# Altium PCB Dev_BRD_STM32F030F4P6TR.PcbDoc
Units mm, origin at the board's own origin, x right, y up, seen from the top; angles counter-clockwise.
Board outline 20 x 22 mm, 2 copper layers (Top Layer, Bottom Layer); 38 components, 24 nets, 78 pads, 15 vias.
Unrouted connection lines stored in the file: 1.
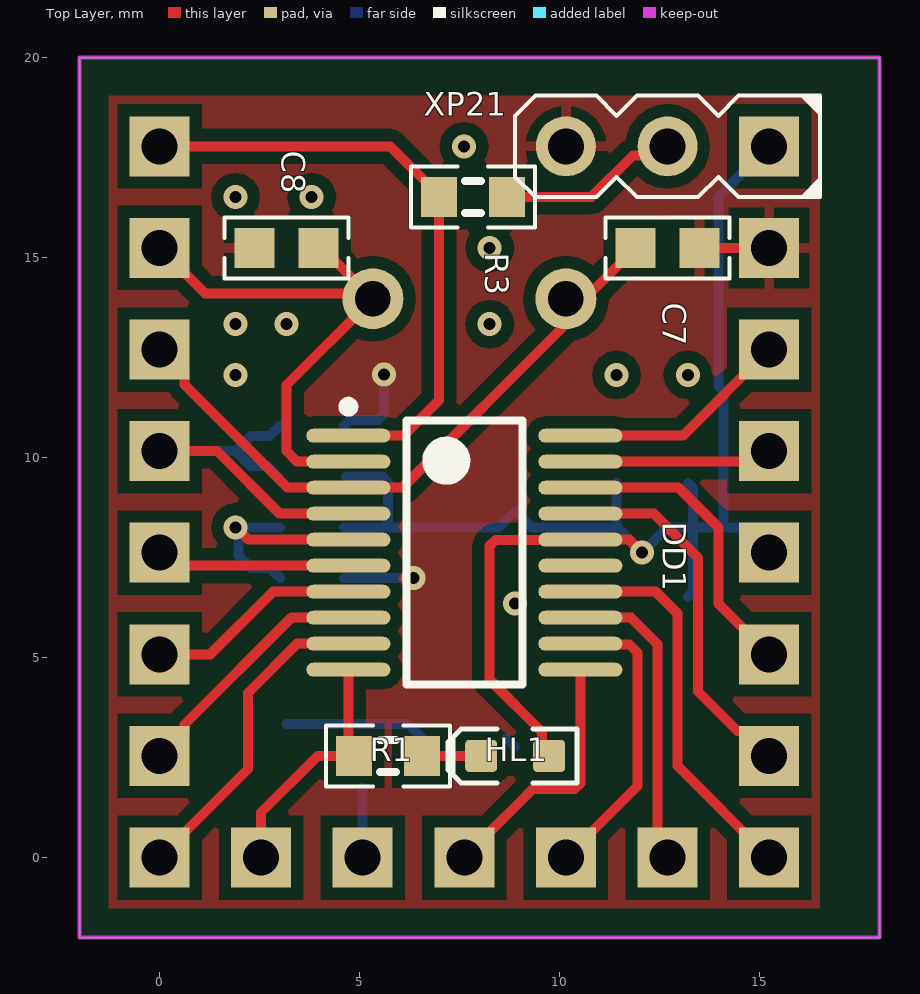
[diagram p0: Top Layer view]
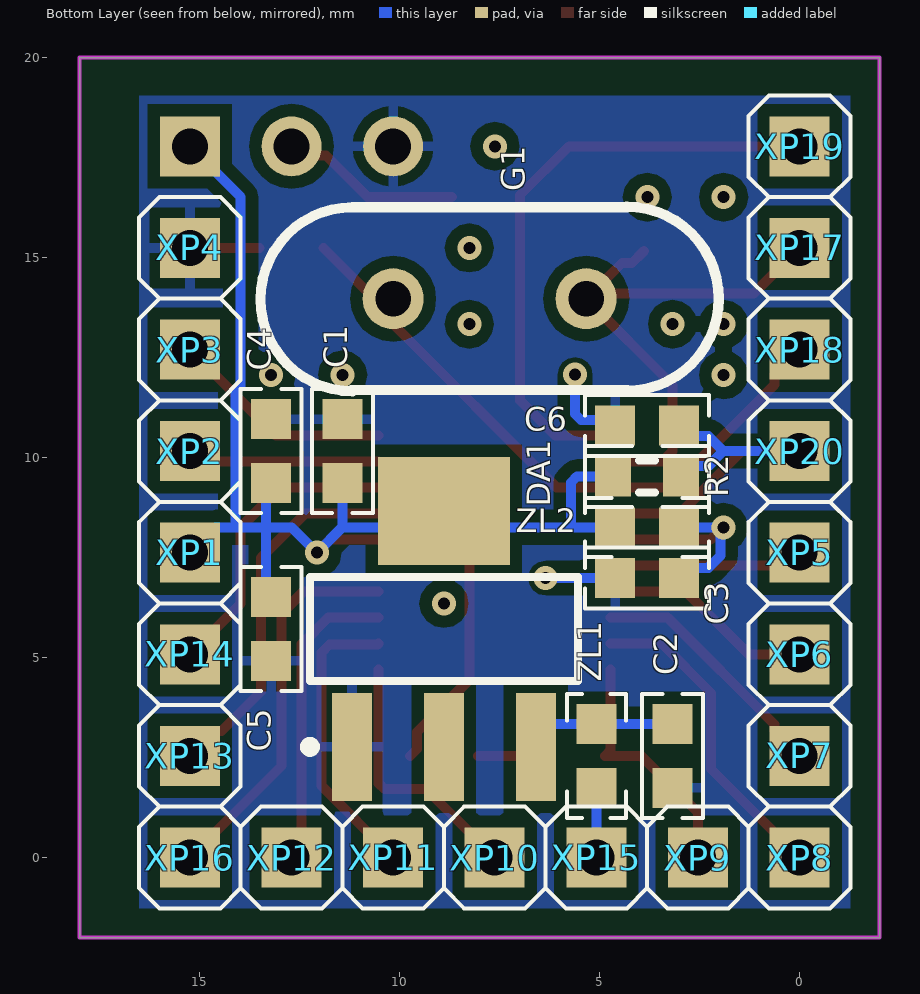
[diagram p1: Bottom Layer view, seen from below]

## Layer stack, top to bottom
Top Solder: solder mask 0.0102, Solder Resist, Dk 3.5
Top Layer: signal copper 0.0356
Dielectric 1: dielectric 0.32, FR-4, Dk 4.8
Bottom Layer: signal copper 0.0356
Bottom Solder: solder mask 0.0102, Solder Resist, Dk 3.5

## Board outline
-2,-2 -2,20 18,20 18,-2

## Design rules (kind name [scope] priority, off if disabled: settings)
Clearance Clearance_1 [InPoly] p1: gap=0.3 ignorepadtopadclearanceinfootprint=TRUE except(0: Arc-Hole Track-Hole SMDPad-Hole THPad-Hole Via-Hole Fill-Hole Poly-Hole Region-Hole Text-Hole)
Clearance [All] p2: gap=0.2 ignorepadtopadclearanceinfootprint=TRUE except(0: Arc-Hole Track-Hole SMDPad-Hole THPad-Hole Via-Hole Fill-Hole Poly-Hole Region-Hole Text-Hole)
PolygonConnect [All] p1: thpad.connectstyle=Relief thpad.reliefconductorwidth=0.254 thpad.reliefentries=4 thpad.polygonreliefangle="90 Angle" thpad.airgapwidth=0.254 smdpad.connectstyle=Relief smdpad.reliefconductorwidth=0.254 smdpad.reliefentries=4 smdpad.polygonreliefangle="90 Angle" smdpad.airgapwidth=0.254 via.connectstyle=Direct via.reliefconductorwidth=0.254 via.reliefentries=4 via.polygonreliefangle="90 Angle" via.airgapwidth=0.254
RoutingVias [All] p1: holewidth=0.5 width=0.8 viastyle="Through Hole" minholewidth=0.3 minwidth=0.6 maxholewidth=0.8 maxwidth=1.2
SolderMaskExpansion [All] p1: expansion=0.102 istentingtop=FALSE
Width [All] p1: maxlimit=0.5 minlimit=0.15 preferedwidth=0.25
30 further rules are at their usual default settings.

## Components (designator, comment, footprint, x,y, rotation, side; value= is the part's Value field where it differs from the comment)
C1 "10u" CAPC1608(0603)N 11.43,10.16 r270 bottom
C2 "10u" CAPC1608(0603)N 3.175,2.54 r90 bottom
C3 "100n" CAPC1608(0603)N 3.81,6.985 r180 bottom
C4 "100n" CAPC1608(0603)N 13.208,10.16 r270 bottom
C5 "10u" CAPC1608(0603)N 13.208,5.715 r90 bottom
C6 "100n" CAPC1608(0603)N 3.81,10.795 r180 bottom
C7 "12p" CAPC1608(0603)N 12.7,15.24 r180 top
C8 "12p" CAPC1608(0603)N 3.175,15.24 r0 top
DA1 "LD1117S33T" SOT223_M 8.89,5.715 r90 bottom
DD1 "STM32F030F4P6TR" STM-TSSOP20_M 7.62,7.62 r0 top
G1 "8MHz" HC-49/S 10.16,13.97 r180 bottom
HL1 "Bl 0603" LED-0603-BLUE 8.89,2.54 r180 top
R1 "510" RESC1608(0603)N 5.715,2.54 r180 top
R2 "10k" RESC1608(0603)N 3.81,9.525 r0 bottom
R3 "100k" RESC1608(0603)N 7.835,16.51 r0 top
XP1 "PLS-1" PLS-1-3D 15.24,7.62 r180 bottom
XP2 "PLS-1" PLS-1-3D 15.24,10.16 r180 bottom
XP3 "PLS-1" PLS-1-3D 15.24,12.7 r180 bottom
XP4 "PLS-1" PLS-1-3D 15.24,15.24 r180 bottom
XP5 "PLS-1" PLS-1-3D 0,7.62 r180 bottom
XP6 "PLS-1" PLS-1-3D 0,5.08 r180 bottom
XP7 "PLS-1" PLS-1-3D 0,2.54 r180 bottom
XP8 "PLS-1" PLS-1-3D 0,0 r180 bottom
XP9 "PLS-1" PLS-1-3D 2.54,0 r180 bottom
XP10 "PLS-1" PLS-1-3D 7.62,0 r180 bottom
XP11 "PLS-1" PLS-1-3D 10.16,0 r180 bottom
XP12 "PLS-1" PLS-1-3D 12.7,0 r180 bottom
XP13 "PLS-1" PLS-1-3D 15.24,2.54 r180 bottom
XP14 "PLS-1" PLS-1-3D 15.24,5.08 r180 bottom
XP15 "PLS-1" PLS-1-3D 5.08,0 r90 bottom
XP16 "PLS-1" PLS-1-3D 15.24,0 r180 bottom
XP17 "PLS-1" PLS-1-3D 0,15.24 r180 bottom
XP18 "PLS-1" PLS-1-3D 0,12.7 r180 bottom
XP19 "PLS-1" PLS-1-3D 0,17.78 r180 bottom
XP20 "PLS-1" PLS-1-3D 0,10.16 r180 bottom
XP21 "PLS-3" PLS-3-3D 15.24,17.78 r180 top
ZL1 "100u" INDC1608(0603)N 5.08,2.54 r90 bottom
ZL2 "100u" INDC1608(0603)N 3.81,8.255 r180 bottom

## Footprints (in the part's own frame and the unit in brackets; to place one, negate y for a bottom-side part, rotate by r counter-clockwise, add the part's x,y. Pads: shape width x height; smd on the part's side, far side on the other; paste and mask are expansions set on the pad)
CAPC1608(0603)N [mm] "Chip Capacitor, Body 1.6x0.8mm, IPC Medium Density"
  rect 1x1 smd: 1(-0.8,0) 2(0.8,0)
  silkscreen extent -1.55,-0.76 1.55,0.76, body extent -0.8,-0.4 0.8,0.4, height 0.3
HC-49/S [mil]
  round 60 hole 35: 1(0,0) 2(190,0)
  silkscreen extent -131,-91 321,91, body extent -128,-92 318,92, height 142
INDC1608(0603)N [mm] "Chip Inductor, Body 1.6x0.8mm, IPC Medium Density"
  rect 1x1 smd: 1(-0.8,0) 2(0.8,0)
  silkscreen extent -1.55,-0.74 1.55,0.74, body extent -0.87,-0.48 0.87,0.48, height 0.71
LED-0603-BLUE [mm]
  round 0.254 on Mech15: 0(0,0)
  rrect25% 0.8x0.8 smd: A(-0.85,0) K(0.85,0)
  Top Layer pour cut-out: -0.5,0.5 0.5,0.5 0.5,-0.5 -0.5,-0.5
  silkscreen extent -1.55,-0.67 1.68,0.67, body extent -0.8,-0.4 0.8,0.4, height 0.75
PLS-1-3D [mm] "Connector; Header; 1 Position"
  rect 1.5x1.5 hole 0.9: 1(0,0)
  silkscreen extent -1.27,-1.27 1.27,1.27, body extent -1.27,-1.27 1.27,1.27, height 8.44
PLS-3-3D [mm] "Connector; Header; 3 Position"
  rect 1.5x1.5 hole 0.9: 1(0,0)
  round 1.5 hole 0.9: 2(2.54,0) 3(5.08,0)
  silkscreen extent -1.27,-1.27 6.35,1.27, body extent -1.27,-1.27 6.35,1.27, height 8.44
RESC1608(0603)N [mm] "Chip Resistor, Body 1.6x0.8mm, IPC Medium Density"
  rect 0.9x1 smd: 1(-0.85,0) 2(0.85,0)
  silkscreen extent -1.55,-0.76 1.55,0.76, body extent -0.8,-0.4 0.8,0.4, height 0.3
SOT223_M [mm] "SOT223, 4-Leads, Body 6.5x3.5mm, Pitch 2.3mm, Lead Span 7mm, IPC Low Density"
  rect 2.7x1 smd: 1(-2.95,2.3) 2(-2.95,0) 3(-2.95,-2.3)
  rect 2.7x3.3 smd: 4(2.95,0)
  silkscreen extent -3.07,-3.35 1.3,3.48, body extent -3.65,-3.35 3.65,3.35, height 1.7
STM-TSSOP20_M [mm] "SOP, 20-Leads, Body 6.6x4.5mm, Pitch 0.65mm, IPC Low Density"
  oval 2.1x0.35 smd: 1(-2.9,2.925) 2(-2.9,2.275) 3(-2.9,1.625) 4(-2.9,0.975) 5(-2.9,0.325) 6(-2.9,-0.325) 7(-2.9,-0.975) 8(-2.9,-1.625) 9(-2.9,-2.275) 10(-2.9,-2.925) 11(2.9,-2.925) 12(2.9,-2.275) 13(2.9,-1.625) 14(2.9,-0.975) 15(2.9,-0.325) 16(2.9,0.325) 17(2.9,0.975) 18(2.9,1.625) 19(2.9,2.275) 20(2.9,2.925)
  silkscreen extent -3.02,-3.3 1.45,3.77, body extent -2.25,-3.3 2.25,3.3, height 1.2

## Part data
C1 C2 C3 C4 C5 C6 C7 C8: library part CAPC1608(0603), "?", Digi-Key Part Number=?, HelpURL=?, Manufacturer Part Number=?, Note=?, Package=?, Part Number=CAPC1608(0603), Price$=?
DA1: "LDO Voltage Regulators 3.3V 0.8A Positive", Digi-Key Part Number=?, HelpURL=http://www.mouser.com/ds/2/389/CD00000544-310772.pdf, Manufacturer Part Number=?, Note=?, Package=?, Part Number=LD1117S33T, Price$=?
DD1: "ARM Microcontrollers - MCU Entry-level ARM Cortex-M0 Value MCU", I/Os (High Current)=15, Mouser Part Number=511-STM32F030F4P6TR, Operating Frequency(F) (Processor speed) (MHz)=48, Package=TSSOP-20, PartNumber=STM32F030F4P6, Supplier Part Number 1=497-14044-5-ND, Supply Voltage(Vcc) min (V)=2.4, ComponentLink1Description="Manufacturer URL", ComponentLink1URL=http://www.st.com/web/en/home.html, ComponentLink2Description=Datasheet, ComponentLink2URL=http://www.st.com/st-web-ui/static/active/en/resource/technical/document/datasheet/DM00088500.pdf, ComponentLink3Description="Package Specification", ComponentLink3URL=http://www.st.com/st-web-ui/static/active/en/resource/technical/document/datasheet/DM00065136.pdf, Core="ARM Cortex-M0", DatasheetVersion="Rev. 1", FLASH Size (Prog) (kB)=16, HelpURL=https://www.mouser.com/ProductDetail/STMicroelectronics/STM32F030F4P6TR?qs=%2Fha2pyFadujR%2FWSfahMbfmbDlEliJR9JQ7e4pIkAHR743YF4U76%252Bsg%3D%3D, Internal RAM Size (kB)=4, Manufacturer Part Number=STM32F030F4P6TR, Mounting Technology="Surface Mount", PackageDescription="20-Pin Thin Shrink Small Outline Package, 6.5 x 4.4 mm Body, 0.65 mm Pitch", PackageReference=TSSOP20, PackageVersion="Rev. 1, 11/2012", Packing=Tube, Part Number=STM32F030F4P6TR, Price$=0.534, Supplier 1=Digi-Key, Supplier 2=Newark, Supplier 3=Mouser, Supplier Part Number 2=06X3648, Supplier Part Number 3=511-STM32F030F4P6
G1: library part "Crystal HC-49/S", "Crystal HC-49/S", Part Number="Crystal HC-49/S"
HL1: library part 150060BS55040, "LED BLUE DIFFUSED 0603 SMD", Digi-Key Part Number=732-12013-1-ND, Package=0603, HelpURL=https://www.digikey.com/products/en?keywords=732-12013-1-ND, Manufacturer Part Number=150060BS55040, Part Number=150060BS55040
R1 R2 R3: library part RESC1608(0603), Digi-Key Part Number=???, HelpURL=???, Manufacturer Part Number=???, Note=???, Package=???, Part Number=RESC1608(0603), Price$=???
XP1 XP2 XP3 XP4 XP5 XP6 XP7 XP8 XP9 XP10 XP11 XP12 XP13 XP14 XP15 XP16 XP17 XP18 XP19 XP20: "CONN HEADER VERT 1POS", Digi-Key Part Number=S1011EC-01-ND, Manufacturer Part Number=PRPC001SAAN-RC, HelpURL=https://www.digikey.com/product-detail/en/sullins-connector-solutions/PRPC001SAAN-RC/S1011EC-01-ND/2775253, Note=???, Part Number=PLS-1, Price$=0.05
XP21: library part PR20203VBNN, "CONN HEADER VERT 3POS 2.54MM", Digi-Key Part Number=1849-1003-ND, Package="Header 3POS 2.54mm", HelpURL=https://www.digikey.com/product-detail/en/metz-connect-usa-inc/PR20203VBNN/1849-1003-ND/7794768, Manufacturer Part Number=PR20203VBNN, Part Number=PR20203VBNN
ZL1 ZL2: library part Ferite1608(0603), "ferite bead", Digi-Key Part Number=???, Manufacturer Part Number=???, Note=???, Package=???, Part Number=Ferite1608(0603), Price$=???

## Via types
v1: diameter 0.6, hole 0.3, Top Layer to Bottom Layer, tented both sides, 15 vias

## Nets (pads, with @x,y where several pads share a name; then routed paths per layer and width w, separated by ;. In a path a pad name is that pad's centre, name@x,y a point inside that pad or via, vN(x,y) a via of type N, cw(c..) or ccw(c..) an arc to the next point about the centre after c; other vN are vias at no path point)
+3.3V: C1.2 C4.2 C5.2 DA1.2 DA1.4 DD1.16 HL1.A R2.2 XP1.1 XP21.1 ZL2.1 | length 38.4
  Top Layer w0.25: HL1.A 9.564,2.716 9.564,3.136 8.255,4.445 8.255,7.795 8.401,7.941 10.516,7.941 DD1.16 11.744,7.945 12.065,7.624 v1(12.065,7.62)
  Bottom Layer w0.25: ZL2.1 5.744,8.255 ; R2.2 5.569,9.525 5.715,9.379 5.715,8.284 5.744,8.255 ; DA1.2@8.665,2.99 DA1.2 ; C1.2 11.43,8.255 ; C5.2 13.335,6.642 13.335,8.255 ; C4.2 13.335,9.233 13.335,8.255 ; XP1.1 14.605,8.255 14.097,8.255 ; XP21.1 13.97,16.51 13.97,11.785 14.097,11.658 14.097,8.255 ; 5.744,8.255 8.48,8.255 DA1.4 9.3,8.255 11.43,8.255 ; 11.43,8.255 v1(12.065,7.62) 12.7,8.255 13.335,8.255 ; 13.335,8.255 14.097,8.255
+5V: XP15.1 ZL1.1 | length 1.7
  Bottom Layer w0.25: XP15.1 ZL1.1
BOOT0: DD1.1 R3.1 XP19.1 | length 15.3
  Top Layer w0.25: XP19.1 5.765,17.78 6.985,16.56 6.985,11.43 6.1,10.545 DD1.1
GND: C1.1 C2.1 C3.1 C4.1 C5.1 C6.1 C7.1 C8.1 DA1.1 DD1.15 XP4.1 XP21.3 | length 5.6
  Top Layer w0.25: C7.1 XP4.1
  Bottom Layer w0.25: C3.1 v1(6.35,6.985) ; C6.1 4.756,10.941 5.465,10.941 5.611,11.088 v1(5.611,12.074)
NetC2_2: C2.2 DA1.3 ZL1.2 | length 3.8
  Bottom Layer w0.25: C2.2 ZL1.2 6.215,3.34 6.59,2.965 DA1.3
NetC3_2: C3.2 DD1.5 ZL2.2 | length 6.1
  Top Layer w0.25: v1(1.905,8.255) 1.916,8.255 2.226,7.945 DD1.5
  Bottom Layer w0.25: C3.2 2.751,7.244 2.281,7.244 1.972,7.553 1.972,8.188 v1(1.905,8.255) ZL2.2
NetC7_2: C7.2 DD1.3 G1.1 XP18.1 | length 16.3
  Top Layer w0.25: XP18.1 0.625,12.075 0.625,11.821 3.201,9.245 6.07,9.245 10.16,13.335 G1.1 10.404,14.214 10.874,14.214 C7.2
NetC8_2: C8.2 DD1.2 G1.2 XP17.1 | length 14
  Top Layer w0.25: XP17.1 1.143,14.097 G1.2@5.207,14.097 ; C8.2@3.893,15.158 4.185,14.865 4.439,14.865 G1.2@5.207,14.097 ; DD1.2 3.44,9.895 3.175,10.16 3.175,11.811 G1.2 G1.2@5.207,14.097
NetDD1_6: DD1.6 XP5.1 | length 4.9
  Top Layer w0.25: XP5.1 0.325,7.295 DD1.6
NetDD1_7: DD1.7 XP6.1 | length 5.4
  Top Layer w0.25: XP6.1 1.27,5.08 2.835,6.645 DD1.7
NetDD1_8: DD1.8 XP7.1 | length 6.2
  Top Layer w0.25: XP7.1 0.625,3.165 0.625,3.325 3.295,5.995 DD1.8
NetDD1_9: DD1.9 XP8.1 | length 8
  Top Layer w0.25: XP8.1 2.21,2.21 2.21,4.115 3.44,5.345 DD1.9
NetDD1_10: DD1.10 R1.2 XP9.1 | length 6.3
  Top Layer w0.25: XP9.1 2.54,1.125 3.955,2.54 R1.2 4.72,2.685 DD1.10
NetDD1_11: DD1.11 XP10.1 | length 6.5
  Top Layer w0.25: XP10.1 8.245,0.625 9.01,1.39 9.33,1.71 10.374,1.71 10.52,1.856 DD1.11
NetDD1_12: DD1.12 XP11.1 | length 7.4
  Top Layer w0.25: XP11.1 11.946,1.786 11.946,5.127 11.747,5.326 10.539,5.326 DD1.12
NetDD1_13: DD1.13 XP12.1 | length 7.6
  Top Layer w0.25: DD1.13 11.785,5.995 12.446,5.334 12.446,0.254 XP12.1
NetDD1_14: DD1.14 XP16.1 | length 9.7
  Top Layer w0.25: DD1.14 12.405,6.645 12.954,6.096 12.954,2.286 XP16.1
NetDD1_17: DD1.17 XP13.1 | length 9.2
  Top Layer w0.25: DD1.17 12.36,8.595 13.462,7.493 13.462,4.151 14.448,3.165 14.615,3.165 XP13.1
NetDD1_18: DD1.18 XP14.1 | length 7.6
  Top Layer w0.25: DD1.18 12.98,9.245 13.97,8.255 13.97,6.35 XP14.1
NetHL1_K: HL1.K R1.1 | length 1.5
  Top Layer w0.25: R1.1 HL1.K
NetR3_2: R3.2 XP21.2 | length 4.5
  Top Layer w0.25: R3.2 10.795,16.51 11.837,17.552 12.472,17.552 XP21.2
nRST: C6.2 DD1.4 R2.1 XP20.1 | length 10
  Top Layer w0.25: XP20.1 1.439,10.16 3.004,8.595 DD1.4
  Bottom Layer w0.25: XP20.1 1.905,10.16 ; R2.1 2.701,9.784 2.281,9.784 1.905,10.16 ; C6.2 2.751,10.536 2.281,10.536 1.905,10.16
SWDCLK: DD1.20 XP3.1 | length 5.6
  Top Layer w0.25: DD1.20 13.085,10.545 XP3.1
SWDIO: DD1.19 XP2.1 | length 4.8
  Top Layer w0.25: DD1.19 14.975,9.895 XP2.1
pads on no net: HL1.0
copper on no net:
  other v1: 8.89,6.35 1.899,12.065 11.424,12.065 13.208,12.065 1.899,13.335 3.175,13.335 8.255,13.335 8.255,15.24 1.899,16.51 3.804,16.51 7.614,17.78

## Polygon pours and split planes (outlines as drawn)
GND on Bottom Layer "GND_L02_P000" (solid, remove dead copper, pour order 0): -1.27,19.05 16.51,19.05 16.51,-1.27 -1.27,-1.27
GND on Top Layer "GND_L01_P001" (solid, remove dead copper, pour order 1): -1.27,19.05 16.51,19.05 16.51,-1.27 -1.27,-1.27

## Keep-outs
Keep-Out Layer:
  lines w0.1: -2,-2 -2,20 ; -2,-2 18,-2 ; -2,-2 -2,20 ; -2,20 18,20 ; -2,20 18,20 ; 18,-2 18,20 ; 18,-2 18,20 ; 18,20 18,20

## Dimensions
18,20 to 18,-2 on Dimensions
-2,20 to 18,20 on Dimensions